# Altium PCB Pannel3.5x2 Ver1.0.PcbDoc (part 4 of 4)
Units mil, origin at the board's own origin, x right, y up, seen from the top; angles counter-clockwise.
Board outline 4133.86 x 2283.46 mil, 4 copper layers (SIGNAL, GROUND, PWR, SIGNAL (Bottom)), stack 61.627 mil thick; 222 components, 165 nets, 808 pads, 673 vias.
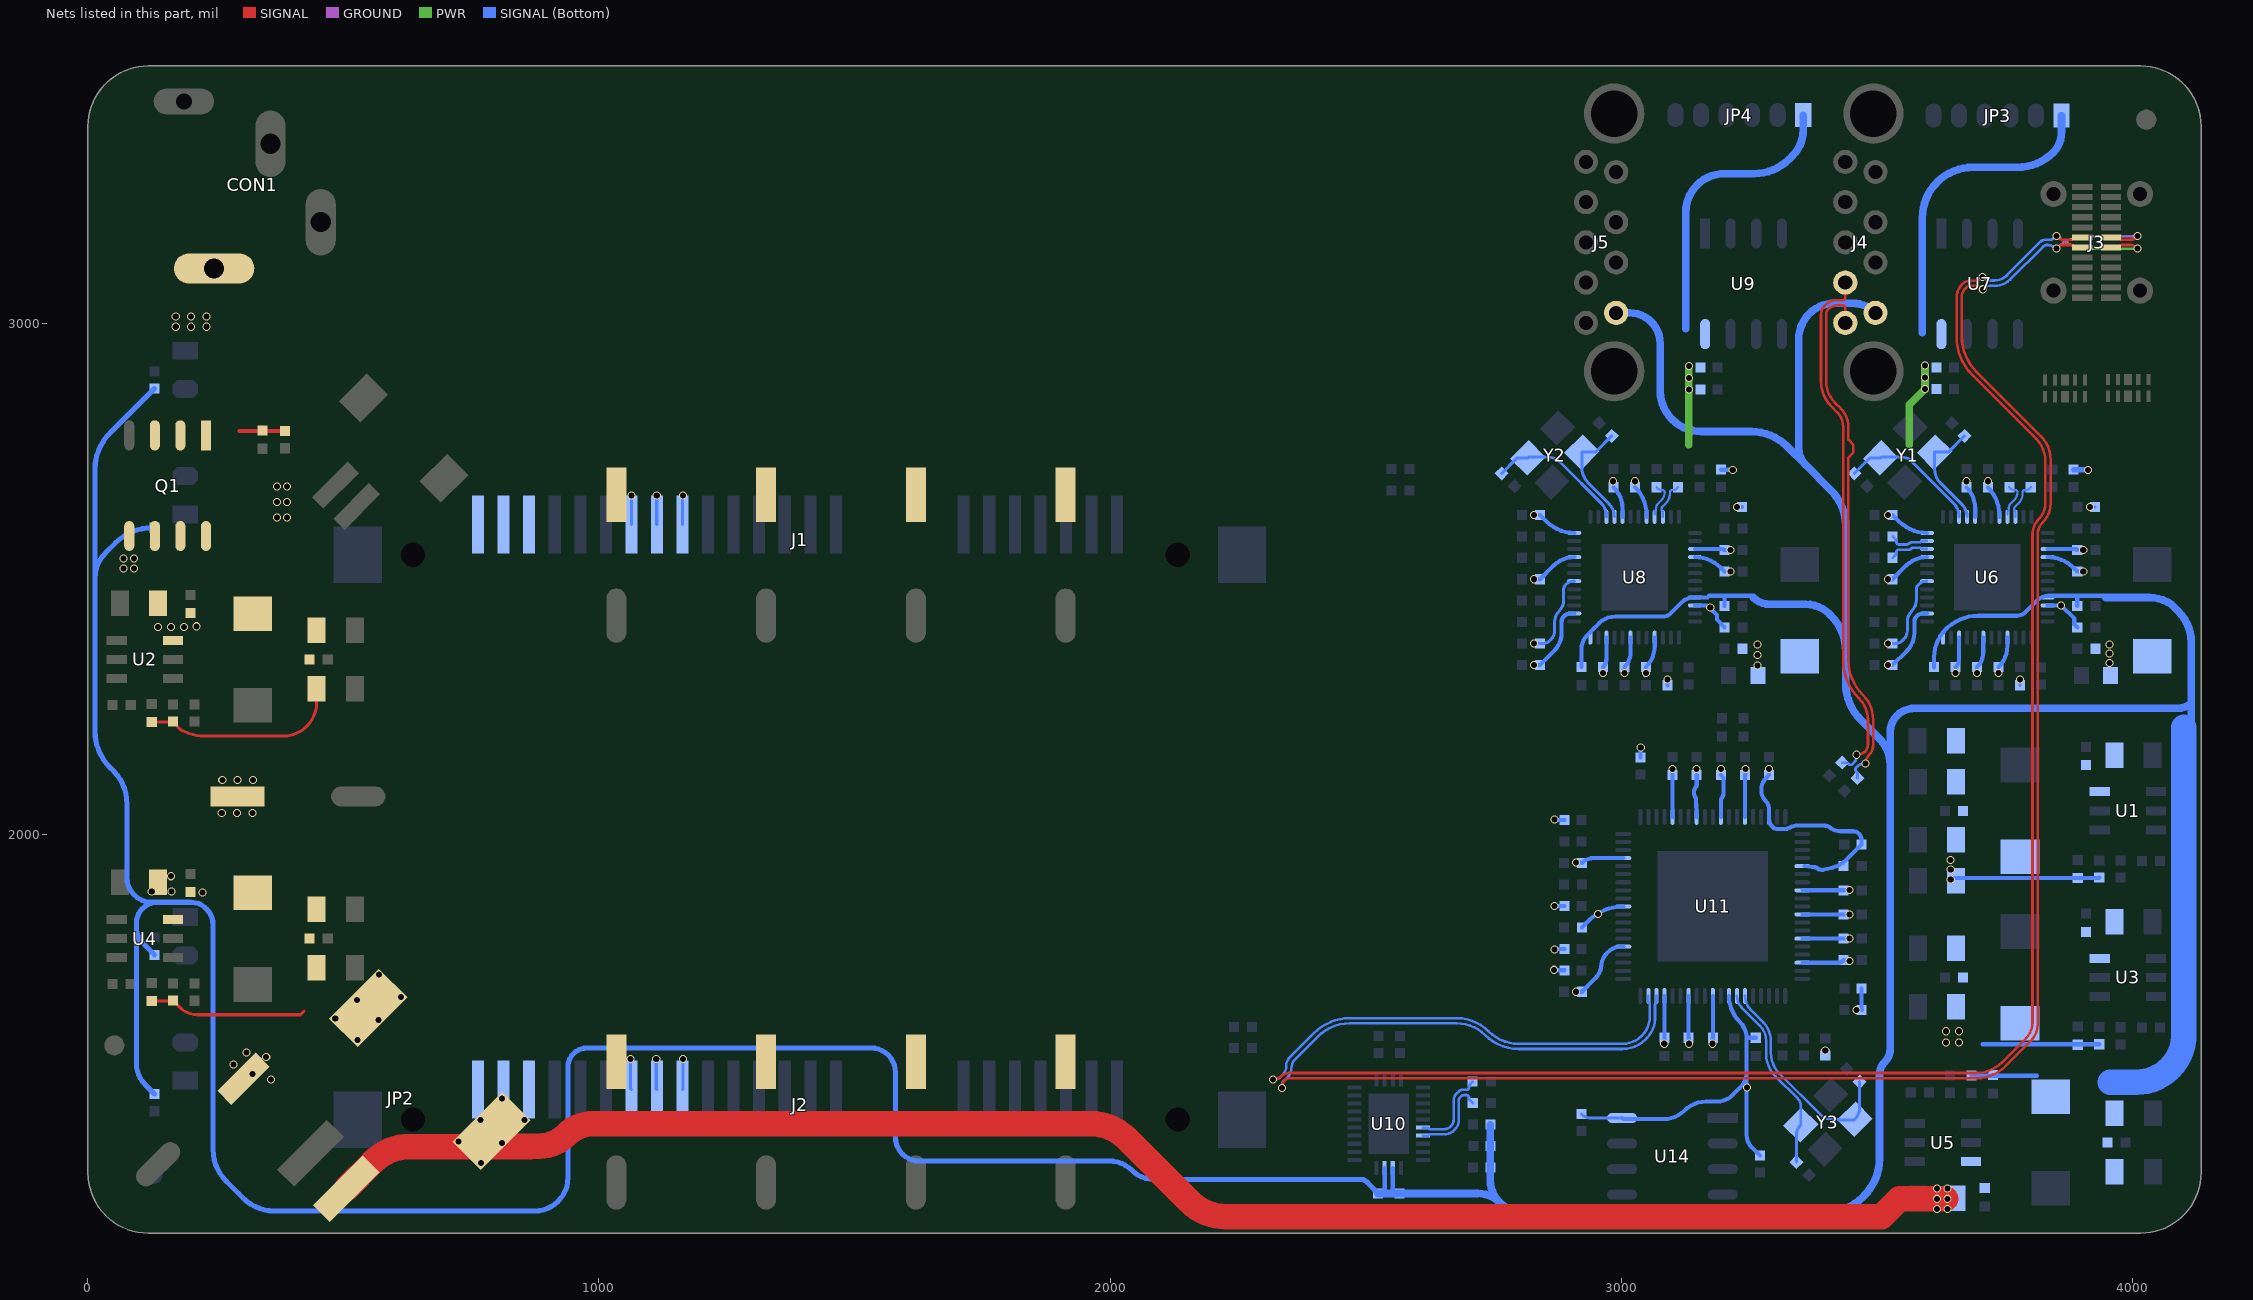
[diagram p6: the nets of this part, all layers, seen from the top]

## Via types
v1: diameter 15.75, hole 11.81, SIGNAL to SIGNAL (Bottom), tented both sides, 673 vias

## Nets (pads, with @x,y where several pads share a name; then routed paths per layer and width w, separated by ;. In a path a pad name is that pad's centre, name@x,y a point inside that pad or via, vN(x,y) a via of type N, cw(c..) or ccw(c..) an arc to the next point about the centre after c; other vN are vias at no path point) (continued)
SSTX3_N: C100.1 J4.9 | length 1032.8
  SIGNAL w5.1: 3418.07,2844.21 cw(c3460.16,2886.28) 3400.65,2886.28 3400.65,3017.54 cw(c3413.8,3017.54) 3404.5,3026.83 cw(c3423.85,3007.49) 3423.85,3034.85 3433.08,3034.85 cw(c3433.08,3029.75) 3436.68,3033.36 cw(c3433.08,3029.75) 3438.18,3029.75 J4.9@3438.18,3000.5 ; 3418.08,2844.2 3429.65,2832.64 cw(c3394.76,2797.75) 3444.1,2797.75 3444.1,2787 3444.1,2772 3454.1,2762 3454.1,2747 3444.1,2737 3444.1,2679.5 3444.1,2340.89 ccw(c3539.97,2340.89) 3472.18,2273.1 cw(c3422.63,2223.56) 3492.7,2223.56 3492.7,2174.76 cw(c3465.67,2174.76) 3484.83,2155.69 cw(c3465.67,2174.76) 3484.78,2155.64 ccw(c3500.08,2140.34) 3478.45,2140.34 cw(c3475.66,2140.34) v1(3477.63,2138.37)
  SIGNAL (Bottom) w5.1: 3459.97,2122.45 cw(c3454.95,2117.43) 3462.05,2117.43 C100.1@3462.05,2110.05 ; 3459.97,2122.45 3459.39,2123.03 cw(c3462.99,2126.64) 3457.89,2126.64 cw(c3462.99,2126.64) 3459.39,2130.25 3463.12,2133.97 cw(c3471.75,2125.34) v1@3471.75,2137.55
SSTX3_P: C98.1 J4.8 | length 1032.6
  SIGNAL w5.1: 3397.32,3033.93 ccw(c3413.7,3017.58) 3390.55,3017.65 ccw(c3413.7,3017.58) 3390.55,3017.58 3390.55,2886.21 ccw(c3459.99,2886.21) 3410.89,2837.11 3422.45,2825.55 cw(c3394.55,2797.66) 3434,2797.66 3434,2340.84 ccw(c3539.84,2340.84) 3464.97,2266.03 ; 3397.33,3033.95 3398.84,3035.46 cw(c3421.76,3012.54) 3421.76,3044.95 3433.08,3044.95 ccw(c3433.08,3050.05) 3436.68,3046.44 ccw(c3433.08,3050.05) 3438.18,3050.05 J4.8@3438.18,3079.3 ; v1(3460.37,2155.63) cw(c3462.34,2153.66) 3462.34,2156.45 3463.32,2156.45 ccw(c3463.32,2175.73) 3476.92,2162.06 ccw(c3463.32,2175.73) 3476.95,2162.1 ; 3465,2266 cw(c3422.5,2223.5) 3482.6,2223.5 3482.6,2175.73 cw(c3463.32,2175.73) 3476.99,2162.13
  SIGNAL (Bottom) w5.1: C98.1@3432.05,2140.05 3439.43,2140.05 cw(c3439.43,2132.95) 3444.45,2137.97 ; 3444.45,2137.97 3445.04,2137.38 ccw(c3448.64,2140.99) 3448.64,2135.89 ccw(c3448.64,2140.99) 3452.24,2137.38 3455.98,2141.12 ccw(c3447.34,2149.75) v1@3459.55,2149.75
SSTX4_N: C99.1 U6.22 | length 78.1
  SIGNAL (Bottom) w5.1: C99.1@3530.72,2541 3535.5,2545.78 ccw(c3529.42,2551.85) 3538.01,2551.85 cw(c3543.11,2551.85) 3539.51,2555.46 cw(c3543.11,2551.85) 3543.11,2556.95 3562.26,2556.95 ccw(c3562.26,2563.77) 3567.08,2558.95 cw(c3571.9,2554.13) 3571.9,2560.94 3582.48,2560.94 cw(c3582.48,2556.12) 3585.88,2559.53 ccw(c3589.29,2562.94) 3589.29,2558.12 U6.22@3597.89,2558.12
SSTX4_P: C101.1 U6.23 | length 78.1
  SIGNAL (Bottom) w5.1: C101.1@3530.72,2583 3535.5,2578.22 cw(c3529.42,2572.15) 3538.01,2572.15 ccw(c3543.11,2572.15) 3539.51,2568.54 ccw(c3543.11,2572.15) 3543.11,2567.05 3558.08,2567.05 ccw(c3558.08,2573.87) 3562.9,2569.05 cw(c3567.72,2564.23) 3567.72,2571.04 3582.48,2571.04 ccw(c3582.48,2575.86) 3585.88,2572.45 cw(c3589.29,2569.05) 3589.29,2573.87 U6.23@3597.89,2573.87
SSTX_N: C95.1 U10.21 | length 167.3
  SIGNAL (Bottom) w5.1: U10.21@2611.93,1410.37 2621.77,1410.37 2624.6,1413.19 2653.29,1413.19 ccw(c2653.29,1441.97) 2673.64,1421.62 2673.72,1421.7 ccw(c2653.44,1441.98) 2682.12,1441.98 2682.12,1479.98 cw(c2689.13,1479.98) 2684.17,1484.93 2686.67,1487.43 ; 2686.68,1487.44 cw(c2692.69,1481.4) 2692.69,1489.92 2697.02,1489.92 cw(c2697.02,1484.82) 2700.62,1488.43 cw(c2697.02,1484.82) 2702.12,1484.82 ccw(c2710.64,1484.82) 2704.6,1478.8 C95.1@2709.41,1474
SSTX_P: C94.1 U10.20 | length 167.1
  SIGNAL (Bottom) w5.1: U10.20@2611.93,1426.12 2621.77,1426.12 2624.6,1423.29 2653.26,1423.29 ccw(c2653.26,1442.06) 2666.52,1428.79 ccw(c2653.26,1442.06) 2672.02,1442.06 2672.02,1479.98 cw(c2689.13,1479.98) 2672.02,1480.04 cw(c2689.13,1479.98) 2676.99,1492.03 cw(c2689.13,1479.98) 2677.03,1492.07 ; 2677.03,1492.08 2682.04,1497.09 ; 2682.48,1497.53 cw(c2688.51,1491.51) 2688.51,1500.02 2697.02,1500.02 ccw(c2697.02,1505.12) 2700.62,1501.52 ccw(c2697.02,1505.12) 2702.12,1505.12 cw(c2711.07,1505.12) 2704.74,1511.46 C94.1@2709.28,1516
TX1_N: C39.2 U8.33 | length 70.1
  SIGNAL (Bottom) w4.29: U8.33@3065.37,2625.55 3065.37,2629.99 cw(c3070.03,2629.99) 3066.73,2633.29 ccw(c3063.44,2636.58) 3068.1,2636.58 3068.1,2638.86 cw(c3078.27,2638.86) 3071.07,2646.05 ; C39.2@3069,2679 C39.2@3071.87,2676.13 ; 3071.08,2646.05 3078.3,2653.27 ; C39.2@3071.88,2676.12 ccw(c3078.47,2682.73) 3078.47,2673.39 3080.56,2673.39 cw(c3080.56,2669.1) 3083.6,2672.14 cw(c3080.56,2669.1) 3084.86,2669.1 cw(c3062.47,2669.1) 3078.31,2653.29
TX1_P: C37.2 U8.34 | length 74.3
  SIGNAL (Bottom) w4.29: U8.34@3081.12,2621.29 3081.12,2629.99 ccw(c3076.46,2629.99) 3079.75,2633.29 cw(c3083.05,2636.58) 3078.39,2636.58 3078.39,2636.73 cw(c3083.41,2636.73) 3079.85,2640.28 3086.77,2647.19 ccw(c3066.54,2667.42) 3095.14,2667.42 3095.14,2669.1 cw(c3099.44,2669.1) 3096.4,2672.14 cw(c3099.44,2669.1) 3099.44,2673.39 3101.53,2673.39 ccw(c3101.53,2682.73) C37.2@3108.12,2676.12 ; C37.2@3108.13,2676.13 C37.2@3111,2679
TX2_N: C40.2 U6.33 | length 70.1
  SIGNAL (Bottom) w4.29: U6.33@3755.37,2625.55 3755.37,2629.99 cw(c3760.03,2629.99) 3756.73,2633.29 ccw(c3753.44,2636.58) 3758.1,2636.58 3758.1,2638.86 cw(c3768.27,2638.86) 3761.07,2646.05 ; C40.2@3759,2679 C40.2@3761.87,2676.13 ; 3761.08,2646.05 3768.3,2653.27 ; C40.2@3761.88,2676.12 ccw(c3768.47,2682.73) 3768.47,2673.39 3770.56,2673.39 cw(c3770.56,2669.1) 3773.6,2672.14 cw(c3770.56,2669.1) 3774.86,2669.1 cw(c3752.47,2669.1) 3768.31,2653.29
TX2_P: C38.2 U6.34 | length 74.3
  SIGNAL (Bottom) w4.29: U6.34@3771.12,2621.29 3771.12,2629.99 ccw(c3766.46,2629.99) 3769.75,2633.29 cw(c3773.05,2636.58) 3768.39,2636.58 3768.39,2636.73 cw(c3773.41,2636.73) 3769.85,2640.28 3776.77,2647.19 ccw(c3756.54,2667.42) 3785.14,2667.42 3785.14,2669.1 cw(c3789.44,2669.1) 3786.4,2672.14 cw(c3789.44,2669.1) 3789.44,2673.39 3791.53,2673.39 ccw(c3791.53,2682.73) C38.2@3798.12,2676.12 ; C38.2@3798.13,2676.13 C38.2@3801,2679
USBD_N: J3.A7 J3.B7 U11.56 | length 4405.8
  SIGNAL w5.1: v1(2318.21,1520.25) cw(c2320.18,1518.27) 2320.18,1521.07 2320.73,1521.07 ccw(c2320.73,1541.37) 2335.07,1526.99 ; 2335.09,1527.01 cw(c2349.44,1512.66) 2349.44,1532.96 3694,1532.96 ccw(c3694,1604.6) 3744.66,1553.94 3791.32,1600.6 ccw(c3759.66,1632.26) 3804.43,1632.26 3804.43,2586.55 cw(c3847.6,2586.55) 3804.43,2586.64 cw(c3847.6,2586.55) 3817.04,2617.04 ccw(c3786.55,2647.6) 3829.72,2647.6 3829.72,2729.44 ccw(c3766.44,2729.44) 3811.18,2774.18 3686.62,2898.75 cw(c3760.77,2972.91) 3655.9,2972.91 3655.9,3049.64 cw(c3693.42,3049.64) 3666.89,3076.17 3666.99,3076.27 ; 3667.02,3076.31 cw(c3683.95,3059.32) 3683.95,3083.3 3693.99,3083.3 ccw(c3693.99,3094.05) v1@3701.59,3086.45 ; v1@3856.98,3165.54 ccw(c3864.37,3175.27) 3864.37,3163.06 3879.69,3163.05 ccw(c3879.69,3171.24) 3885.48,3165.45 cw(c3891.27,3159.66) 3891.27,3167.85 J3.B7@3901.65,3167.85 ; J3.A7@3958.34,3148.16 3968.74,3148.16 ccw(c3968.74,3156.34) 3974.52,3150.55 cw(c3980.3,3144.77) 3980.3,3152.95 3996.63,3152.95 cw(c3996.63,3140.74) v1@4005.27,3149.37
  PWR w5.1: v1@3852,3172 ccw(c3915.26,3235.26) 3897.26,3147.63 ccw(c3915.26,3235.26) 3915.26,3145.8 v1(4010,3145.8) ; v1@4010,3146 v1@4012,3146
  SIGNAL (Bottom) w5.1: v1(2318.21,1520.25) cw(c2320.18,1518.27) 2320.18,1521.07 2324.08,1521.07 ccw(c2324.08,1533.28) 2332.72,1524.64 2337.36,1529.29 ccw(c2319.99,1546.67) 2344.56,1546.67 cw(c2369.13,1546.67) 2351.76,1564.04 2399.19,1611.47 cw(c2468.96,1541.7) 2399.27,1611.56 cw(c2468.96,1541.7) 2468.96,1640.37 2678.11,1640.37 cw(c2678.11,1552.2) 2740.44,1614.56 2740.5,1614.5 ccw(c2799.41,1673.41) 2799.41,1590.1 3002.08,1590.1 ccw(c3002.08,1643.87) 3040.1,1605.85 ccw(c3002.08,1643.87) 3055.85,1643.87 3055.85,1666.37 ccw(c3050.98,1666.37) U11.56@3054.42,1669.81 ; U11.56@3053,1683.8 3053,1673.25 ccw(c3057.87,1673.25) U11.56@3054.43,1669.81 ; v1@3711.73,3087.12 ccw(c3720.37,3095.76) 3720.37,3083.54 3729.87,3083.54 ccw(c3729.87,3118.69) 3749.62,3089.62 ccw(c3729.87,3118.69) 3754.72,3093.84 3820.3,3159.42 cw(c3829.08,3150.64) 3829.08,3163.05 3838.41,3163.05 ccw(c3838.41,3173.39) 3845.71,3166.08 v1@3849.03,3169.39 ; v1@3849.03,3169.39 cw(c3851,3167.42) v1(3851,3170.21)
  other v1: 3707,3090.7
USBD_P: J3.A6 J3.B6 U11.55 | length 4412.7
  SIGNAL w5.1: v1@2336.57,1508.1 cw(c2351.33,1508.1) 2340.89,1518.53 cw(c2351.33,1508.1) 2351.33,1522.86 3695.07,1522.86 ccw(c3695.07,1602.01) 3751.02,1546.02 ; v1(3707.13,3066.29) cw(c3707.13,3069.68) 3704.73,3067.28 ccw(c3690.45,3053) 3703.3,3068.58 ccw(c3690.45,3053) 3690.45,3073.2 3684,3073.2 ccw(c3684,3059.19) 3674.09,3069.09 ccw(c3693.63,3049.55) 3666,3049.55 3666,2975 ccw(c3765.83,2975) 3695.23,2904.42 3821.28,2778.37 cw(c3776.54,2733.62) 3839.82,2733.62 3839.82,2647.56 cw(c3786.64,2647.56) 3824.29,2610.01 cw(c3786.64,2647.56) 3824.24,2609.96 ccw(c3847.69,2586.51) 3814.53,2586.51 3814.53,1628.08 cw(c3769.76,1628.08) 3801.42,1596.42 3751.04,1546.04 ; v1@3856.98,3150.47 cw(c3864.37,3140.74) 3864.37,3152.95 3879.69,3152.95 cw(c3879.69,3144.77) 3885.48,3150.56 ccw(c3891.27,3156.35) 3891.27,3148.16 J3.B6@3901.65,3148.16 ; J3.A6@3958.34,3167.84 3968.74,3167.84 cw(c3968.74,3159.66) 3974.52,3165.45 ccw(c3980.3,3171.23) 3980.3,3163.05 3996.63,3163.05 ccw(c3996.63,3175.26) 4005.27,3166.63 v1@4008.03,3169.39 ; v1@4008.03,3169.39 cw(c4010,3167.41) v1(4010,3170.2)
  GROUND w5.1: v1@3850,3145 cw(c3910.85,3084.15) 3893.19,3168.37 cw(c3910.85,3084.15) 3910.85,3170.2 v1(4010,3170.2)
  SIGNAL (Bottom) w5.1: v1(2335.75,1503.28) ccw(c2333.77,1505.25) 2336.57,1505.25 2336.57,1509.15 cw(c2348.78,1509.15) 2340.14,1517.78 2347.46,1525.11 ccw(c2330.09,1542.48) 2354.66,1542.48 cw(c2379.23,1542.48) 2361.86,1559.86 2406.3,1604.3 cw(c2469,1541.61) 2469,1630.27 2678.04,1630.27 cw(c2678.04,1552.04) 2733.36,1607.36 ccw(c2799.41,1673.41) 2733.45,1607.26 ccw(c2799.41,1673.41) 2799.27,1580 ccw(c2799.41,1673.41) 2799.41,1580 3002.13,1580 ccw(c3002.13,1643.76) 3047.21,1598.68 3050.2,1601.67 ; 3050.23,1601.7 ccw(c3012.18,1639.69) 3065.95,1639.69 3065.95,1666.37 cw(c3070.82,1666.37) U11.55@3067.38,1669.81 ; U11.55@3067.37,1669.81 ccw(c3063.93,1673.25) 3068.8,1673.25 U11.55@3068.8,1683.8 ; v1@3711.88,3069.88 cw(c3720.5,3061.23) 3719.69,3073.42 cw(c3720.5,3061.23) 3720.5,3073.44 3732.03,3073.44 ccw(c3732.03,3113.48) 3734.99,3073.55 ccw(c3732.03,3113.48) 3760.34,3085.17 3824.49,3149.32 cw(c3833.26,3140.54) 3833.26,3152.95 3834.22,3152.95 cw(c3834.22,3132.52) 3848.67,3146.97 v1@3849.03,3146.62 ; v1@3849.03,3146.62 ccw(c3851,3148.59) v1(3851,3145.8)
VBUS: C5.2 C6.2 C19.2 C20.2 C29.1 C33.2 C34.1 C35.1 C57.2 C58.2 C79.2 C80.2 C89.2 C90.2 J4.1 J5.1 L5.2 R9.1 R12.1 R13.1 R14.1 R15.1 R28.1 R29.1 R34.2 U1.3 U3.3 U6.12 U6.45 U8.12 U8.45 U10.26 U10.27 | length 11989.3
  SIGNAL (Bottom) w8: U10.27@2537.12,1347.38 2537.12,1305.34 2545,1297.46 ; U10.26@2552.87,1347.38 2552.87,1300.09 2555.5,1297.46 ; C80.2@2922,2327 2922,2361.67 cw(c2962.24,2361.67) 2933.76,2390.1 ; 2933.78,2390.12 2945.57,2401.9 2945.98,2402.4 cw(c2955.13,2394.73) 2946.67,2403.15 ; 2946.69,2403.17 2947.15,2403.63 2956.36,2412.84 cw(c2988.13,2381.06) 2988.13,2426 3081.92,2426 ccw(c3081.92,2446.08) 3096.12,2431.88 3117.62,2453.38 cw(c3142.36,2428.64) 3140.26,2463.57 cw(c3142.36,2428.64) 3142.36,2463.63 U8.45@3144.11,2463.63 3168.63,2463.63 3171.78,2466.78 3202,2466.78 ; C79.2@3202,2447 3202,2466.78 ; 3257.98,2466.78 3202,2466.78 ; C58.2@3611.5,2326.5 ccw(c3568.32,2369.68) C58.2@3612,2327 3612,2346.29 cw(c3689.71,2346.29) 3634.76,2401.24 3636.69,2403.17 ; 3636.72,2403.2 cw(c3645.13,2394.73) 3637.3,2403.74 3639.37,2405.54 cw(c3698.46,2337.54) 3698.46,2427.63 3773.91,2427.63 ccw(c3773.91,2451.09) 3790.49,2434.49 3813.5,2457.5 cw(c3835.91,2435.09) 3822.13,2463.63 cw(c3835.91,2435.09) 3835.91,2466.78 3891,2466.78 ; R9.1@3685,1527.73 3813.27,1527.73 ; C57.2@3892,2447 3892,2465.78 3891,2466.78 ; 3947.98,2466.78 3891,2466.78
  SIGNAL (Bottom) w10: 95,1812.01 95,1552.51 ccw(c155.8,1552.51) 112.77,1509.55 ; 112.81,1509.52 R13.1@130.61,1491.71 ; R12.1@130.61,1764.25 108.55,1786.31 cw(c141.26,1819.02) 95,1819.02 95,1826.03 cw(c135.97,1826.03) 107,1855 cw(c135.97,1826.03) 135.97,1867 ; R15.1@130.61,2599.71 125.13,2599.71 ccw(c125.13,2499.71) 54.42,2570.42 34.21,2550.21 ccw(c83.01,2501.42) 14,2501.42 ; R14.1@130.61,2872.25 43.29,2784.92 ccw(c114,2714.21) 14,2714.21 14,2501.42 ; 231.97,1854.03 ccw(c200.62,1822.62) 226.64,1858.57 220.9,1862.73 ccw(c215.62,1855.44) 217.68,1864.2 210.78,1865.82 ccw(c200.62,1822.62) 200.62,1867 135.97,1867 ; 232,1854 cw(c200.62,1822.62) 245,1822.62 245,1706.07 245,1383.56 ccw(c333,1383.56) 270.82,1321.3 295.18,1296.93 303.3,1288.82 ccw(c365.56,1351) 365.56,1263 873.94,1263 ccw(c873.94,1328.34) 920.12,1282.12 ; 920.16,1282.16 ccw(c873.94,1328.34) 939.27,1328.34 939.27,1544.91 cw(c976.36,1544.91) 950.14,1571.14 cw(c976.36,1544.91) 976.36,1582 1532.2,1582 cw(c1532.2,1534.2) 1566,1568 cw(c1532.2,1534.2) 1580,1534.2 1580,1407.2 ccw(c1626.36,1407.2) 1593.58,1374.42 ccw(c1626.36,1407.2) 1626.36,1360.84 1998.81,1360.84 cw(c1998.81,1299.65) 2042.06,1342.94 ; 2042.08,1342.92 ccw(c2085.35,1386.19) 2085.35,1325 2489.79,1325 cw(c2489.79,1306.92) 2502.57,1319.71 cw(c2490,1307) 2502.61,1319.66 cw(c2490,1307) 2502.66,1319.61 cw(c2490,1307) 2502.94,1319.33 2507.87,1314.15 2519.16,1302.31 C90.2@2524,1297.46 ; 14,2501.42 14,2201.42 ccw(c114,2201.42) 43.29,2130.71 cw(c-16.98,2059.23) 76.51,2059.23 76.51,1915.33 ccw(c124.43,1915.33) 90.55,1881.45 ccw(c125.44,1916.34) 125.44,1867 135.97,1867
  SIGNAL (Bottom) w15: C90.2@2524,1297.46 2545,1297.46 2555.5,1297.46 C89.2@2566,1297.46 2719.15,1297.46 cw(c2719.15,1236.18) 2762.43,1279.57 ccw(c2807.79,1324.87) 2807.79,1260.76 3401.42,1260.76 ccw(c3401.42,1360.76) 3472.13,1290.05 3475.71,1293.63 ccw(c3405,1364.34) 3505,1364.34 3505,1529.3 cw(c3541.12,1529.3) 3515.55,1554.82 ; R29.1@2743.73,1432 R34.2@2743.73,1348 2743.73,1323.13 ccw(c2803.76,1323.13) 2761.32,1280.68 ; J5.1@2989.9,3020.2 3015.91,3020.2 cw(c3015.91,2960.11) 3058.4,3002.6 cw(c3015.91,2960.11) 3076,2960.11 3076,2868.23 ccw(c3156.23,2868.23) 3099.48,2811.52 ccw(c3156.23,2868.23) 3156.23,2788 3253.72,2788 cw(c3253.72,2688) 3324.37,2758.77 cw(c3253.72,2688) 3324.43,2758.71 3360.51,2722.63 ; 3258.01,2463.26 ccw(c3290.05,2495.35) 3290.05,2450 3361,2450 cw(c3361,2384.82) 3407.09,2430.91 3409.86,2428.14 cw(c3339.15,2357.43) 3439.15,2357.43 ; J4.1@3497.18,3020.2 ccw(c3451.79,2974.81) 3473.42,3035.25 ccw(c3451.79,2974.81) 3451.79,3039 3417.52,3039 ccw(c3417.52,2968.48) 3367.67,3018.36 ccw(c3417.52,2968.48) 3347,2968.48 3347,2755.34 ccw(c3393.34,2755.34) 3360.51,2722.63 ; 3515.61,1554.87 ccw(c3490.04,1580.39) 3526.16,1580.39 3526.16,2135.16 ; 3539.15,2232.15 ccw(c3570.51,2200.79) 3526.16,2200.79 3526.16,2135.17 ; 3539.18,2232.18 cw(c3574.11,2197.19) 3574.11,2246.63 4089.97,2246.63 ccw(c4089.97,2282.03) 4115,2257 ; 3947.98,2463.28 4032.38,2463.28 cw(c4032.38,2385.2) 4076.13,2449.87 4089.54,2436.46 cw(c4028.06,2374.99) 4115,2374.99 4115,2257 ; 4100.65,2209 4115,2223.35 4115,2257 ; 3360.51,2722.63 3409.86,2673.29 cw(c3339.15,2602.58) 3439.15,2602.58 3439.15,2357.43 ; 3439.15,2357.43 3439.15,2294.6 ccw(c3539.15,2294.6) 3468.44,2223.89 3504.13,2188.19 cw(c3450.93,2135) 3526.16,2135.17
  SIGNAL (Bottom) w50: 3956.56,1515 4007.35,1515 ccw(c4007.35,1608.3) 4073.33,1542.33 ccw(c4007.35,1608.3) 4100.65,1608.3 4100.65,2209
VCC1.05V-VL822: C1.1 C9.2 C11.1 C12.1 C109.2 C110.2 C111.2 C112.2 C113.2 C114.2 C115.2 C116.2 C117.2 C118.2 C119.2 C120.2 C121.1 C122.1 L1.2 R1.1 U11.5 U11.8 U11.11 U11.14 U11.27 U11.30 U11.33 U11.36 U11.48 U11.51 U11.54 U11.67 | length 1402.7
  SIGNAL (Bottom) w8: 2933.36,1828.36 C119.2@2923,1818 2935.86,1830.86 cw(c3003.8,1762.91) U11.67@3003.8,1859 ; v1(3084,1590.28) 3084.25,1590.53 3084.25,1601.75 C112.2@3084.5,1602 U11.54@3084.5,1683.8 ; U11.5@3100.3,2034.2 C116.2@3100.3,2116 v1(3100.3,2127.72) ; U11.51@3131.8,1683.8 C117.2@3131.8,1602 3131.9,1601.9 3131.9,1590.38 v1(3132,1590.28) ; U11.8@3147.5,2034.2 3145.86,2069.17 ccw(c3137.86,2068.8) 3144.61,2073.1 cw(c3158.95,2082) 3145.76,2092.53 ccw(c3139.5,2097.51) 3147.5,2097.51 C109.2@3147.5,2116 ; v1(3178.75,1590.28) 3178.88,1590.41 3178.88,1601.88 C110.2@3179,1602 U11.48@3179,1683.8 ; U11.11@3194.7,2034.2 3194.7,2062.79 cw(c3216.21,2062.79) 3196.04,2070.26 cw(c3203.53,2067.45) 3197.02,2072.1 ccw(c3183.35,2082) 3200.23,2082.16 3200.08,2110.16 C120.2@3194.7,2116 ; U11.14@3242,2034.2 C111.2@3242,2116 ccw(c3239.59,2118.41) 3243,2118.41 v1(3243,2127.72) ; U11.36@3354.2,1748.8 3422.45,1748.8 ccw(c3422.45,1766.55) C115.2@3435,1754 3436.04,1752.96 3445.68,1752.96 v1(3446.72,1751.93) ; U11.33@3354.2,1796 C118.2@3435,1796 v1(3446.72,1796) ; U11.30@3354.2,1843.3 C113.2@3435,1843.3 3435.15,1843.15 3446.57,1843.15 v1(3446.72,1843) ; U11.27@3354.2,1890.5 C114.2@3435,1890.5 3435.25,1890.75 3446.47,1890.75 v1(3446.72,1891) ; C121.1@3650.72,1914.28 C9.2@3893,1914.28 3893.49,1914.78 3934.51,1914.78 R1.1@3935,1915.27
  other v1: 2954,1844 3644.5,1911.99 3644.5,1930.99 3644,1950 3147.5,2127.72 3194.7,2127.72
VCC1V2-B: C46.2 C47.2 C49.2 C50.2 C51.2 C52.2 C53.2 C54.2 C55.2 C56.2 L6.2 U6.4 U6.10 U6.18 U6.21 U6.24 U6.29 U6.32 U6.40 | length 723.6
  SIGNAL (Bottom) w6: v1(3522.05,2373) 3536.35,2373 ccw(c3536.35,2391.47) 3544.79,2375.04 ccw(c3536.35,2391.47) 3549.4,2378.4 3552.78,2381.78 ccw(c3536.52,2398.03) 3559.51,2398.03 3559.51,2416 cw(c3588.64,2416) 3568.02,2436.58 ; v1(3522.05,2499) C56.2@3530.72,2499 ; v1(3522.05,2625) C54.2@3530.72,2625 ; 3568.04,2436.6 3568.31,2436.87 ; 3568.33,2436.89 ccw(c3547.06,2458.12) 3577.11,2458.12 3577.11,2479.38 cw(c3588.05,2479.38) 3579.91,2486.68 3582.59,2489.67 cw(c3595.78,2476.46) 3595.78,2495.13 U6.18@3597.89,2495.13 ; v1(3653.58,2315.28) 3653.58,2326.58 C52.2@3654,2327 ; C55.2@3675,2679 v1(3675,2690.72) ; C49.2@3717,2679 v1(3717,2690.72) ; C51.2@3738,2327 v1(3738,2315.28) 3738,2313.41 ccw(c3741.41,2313.41) v1@3739,2311
  SIGNAL (Bottom) w8: C56.2@3530.72,2499 3557.25,2525.54 cw(c3597.89,2484.9) U6.21@3597.89,2542.37 ; C54.2@3530.72,2625 3543.62,2612.09 ccw(c3597.89,2666.36) U6.24@3597.89,2589.61 ; C52.2@3654,2327 ccw(c3637.39,2343.61) 3660.88,2343.61 U6.10@3660.88,2384.89 ; C55.2@3675,2679 cw(c3633.05,2637.05) 3692.38,2637.05 U6.29@3692.38,2621.11 ; C49.2@3717,2679 cw(c3662.39,2624.39) 3739.62,2624.39 U6.32@3739.62,2621.11 ; C51.2@3738,2327 ccw(c3696.07,2368.93) 3755.37,2368.93 U6.4@3755.37,2384.89 ; U6.40@3834.11,2542.37 cw(c3834.11,2471.1) 3861.24,2537.01 cw(c3834.11,2471.1) 3884.51,2521.49 C50.2@3892,2514 v1(3903.72,2514)
  other v1: 3955,2335 3955,2354 3955,2371
VCC1V2-C: C68.2 C69.2 C71.2 C72.2 C73.2 C74.2 C75.2 C76.2 C77.2 C78.2 L7.2 U8.4 U8.10 U8.18 U8.21 U8.24 U8.29 U8.32 U8.40 | length 739.8
  SIGNAL (Bottom) w6: v1@2826,2499 v1(2829,2499) C73.2@2840.72,2499 ; v1(2829,2373) C74.2@2840.72,2373 2846.35,2373 ccw(c2846.35,2391.47) 2859.4,2378.4 2862.78,2381.78 ccw(c2846.52,2398.03) 2869.51,2398.03 2869.51,2415.62 cw(c2899.56,2415.62) 2878.31,2436.87 ; v1(2829,2625) C71.2@2840.72,2625 ; 2878.33,2436.89 ccw(c2857.06,2458.12) 2887.11,2458.12 2887.11,2479.38 cw(c2898.05,2479.38) 2888.72,2485.1 2889.84,2486.92 2892.58,2489.66 cw(c2905.78,2476.46) 2905.78,2495.13 U8.18@2907.89,2495.13 ; v1(2964,2315.28) C77.2@2964,2327 ; v1(2984,2690.72) 2985,2689.72 C78.2@2985,2679 ; C76.2@3027,2679 v1(3027,2690.72) ; v1@3045,2309.65 3048,2312.65 v1(3048,2315.28) C75.2@3048,2327 ; C72.2@3202,2514 v1(3213.72,2514) v1@3214.72,2513
  SIGNAL (Bottom) w8: C73.2@2840.72,2499 2867.25,2525.54 cw(c2907.89,2484.9) U8.21@2907.89,2542.37 ; C71.2@2840.72,2625 2853.62,2612.09 ccw(c2907.89,2666.36) U8.24@2907.89,2589.61 ; C77.2@2964,2327 ccw(c2947.39,2343.61) 2970.88,2343.61 U8.10@2970.88,2384.89 ; C78.2@2985,2679 cw(c2943.05,2637.05) 3002.38,2637.05 U8.29@3002.38,2621.11 ; C76.2@3027,2679 cw(c2972.39,2624.39) 3049.62,2624.39 U8.32@3049.62,2621.11 ; C75.2@3048,2327 ccw(c3006.07,2368.93) 3065.37,2368.93 U8.4@3065.37,2384.89 ; U8.40@3144.11,2542.37 cw(c3144.11,2471.1) 3194.51,2521.49 C72.2@3202,2514
  other v1: 3266,2330 3266,2351 3266,2371
VCC3.3V-VL822: C15.1 C23.2 C25.1 C26.1 C102.2 C103.2 C104.2 C105.2 C106.2 L3.2 R5.1 R30.2 R31.2 R33.2 R35.2 R38.2 R40.2 R43.2 R44.2 R45.2 R46.2 R47.1 U11.17 U11.24 U11.46 U11.62 U11.73 U14.8 | length 1784.5
  SIGNAL (Bottom) w6: R47.1@2922,1452.73 ccw(c2940.67,1471.4) 2940.67,1445 U14.8@3001.57,1445
  SIGNAL (Bottom) w8: v1(2868,1735) ccw(c2870.41,1737.41) 2870.41,1734 R33.2@2888.54,1734 ; v1(2869,1775) cw(c2871.41,1772.59) 2871.41,1776 R31.2@2888.54,1776 ; v1(2869,1860) R30.2@2888.54,1860 ; v1(2869,2029) ccw(c2871.41,2031.41) 2871.41,2028 R35.2@2888.54,2028 ; v1(2911.28,1692) C103.2@2923,1692 2947.86,1716.86 ; v1(2911.28,1945) 2911.78,1944.5 2922.5,1944.5 C102.2@2923,1944 cw(c2945.93,1921.07) 2945.93,1953.5 U11.73@3003.8,1953.5 ; 2948.98,1717.98 ccw(c2919.96,1747) 2958.71,1733.48 ccw(c2919.96,1747) 2960.41,1740.04 ccw(c2919.96,1747) 2960.98,1745.75 cw(c3003.3,1738.6) 2972.95,1768.95 cw(c3000.35,1741.56) 3000.35,1780.3 U11.62@3003.8,1780.3 ; U14.8@3001.57,1445 3003.81,1442.76 3082.56,1442.76 ccw(c3082.56,1501.21) 3123.88,1459.88 cw(c3165.21,1418.56) 3165.21,1477 3185.87,1477 ccw(c3185.87,1523.56) 3218.79,1490.64 3232.43,1504.27 ccw(c3201.7,1535) 3245.16,1535 ; R38.2@3037.3,2150.57 3037.65,2150.92 3037.65,2169.65 v1(3038,2170) ; U11.46@3210.5,1683.8 ccw(c3281.24,1683.8) 3231.21,1633.79 ; 3231.24,1633.76 cw(c3197.55,1600.12) 3245.16,1600.12 ; C106.2@3263,1602 3245.16,1602 3245.16,1600.12 ; R46.2@3271,1371.73 3255.36,1387.37 cw(c3279.98,1412) 3245.16,1412 3245.16,1535 ; v1(3289,2127.72) 3289.1,2127.62 3289.1,2116.1 C104.2@3289.2,2116 3283.47,2110.27 ccw(c3306.35,2087.4) 3274,2087.4 3274,2084.75 ccw(c3299.95,2084.75) 3281.58,2066.42 cw(c3263.25,2048.05) 3289.2,2048.05 U11.17@3289.2,2034.2 3289.2,2030.05 ccw(c3309.66,2030.05) 3292.01,2019.71 ccw(c3309.66,2030.05) 3295.19,2015.58 ccw(c3305,2022.39) 3296.54,2013.97 ccw(c3305,2022.39) 3296.58,2013.92 ccw(c3305,2022.39) 3305,2010.45 3310.38,2010.45 3320.7,2010.45 ccw(c3320.7,2022.39) 3325.29,2011.37 3331.68,2014.03 ; 3334,2015 3331.68,2014.03 ; U11.24@3358,1938 3378.78,1935.5 cw(c3377.87,1927.56) 3382.71,1933.92 ccw(c3393,1947.3) 3396.95,1930.89 3411.29,1934.34 ccw(c3399,1989.91) 3439.24,1949.67 R45.2@3469.57,1980 3469.57,1989.96 ccw(c3453.96,1989.96) 3465,2001 ccw(c3452.93,1988.93) 3452.93,2006 3428.39,2006 cw(c3428.39,2038.08) 3406.52,2014.61 ccw(c3396.1,1993.1) 3396.1,2017 3342.81,2017 ccw(c3342.81,1994.64) 3341.78,2016.98 ccw(c3342.81,1994.64) 3331.68,2014.03 ; v1(3459.98,1656) R44.2@3469.73,1656 ; R43.2@3469.73,1698 3469.73,1657.27 R44.2@3471,1656 ; 3706.73,1589.27 R5.1@3935,1589.27 ; 3245.16,1535 3245.16,1600.12
  other v1: 3246,1505 3399,1577.17 3635,1592.82 3661,1592.82 3635,1614.69 3661,1614.69
VCC3V3-B: C48.2 C59.2 C60.2 C61.2 C62.2 JP3.1 R16.1 R17.1 R20.1 R21.1 U6.7 U6.14 U6.39 U6.46 U7.8 | length 1210.7
  PWR w15: 3563,2762 3563,2840 v1(3594,2871) v1(3594,2894) v1(3594,2917)
  SIGNAL (Bottom) w6: v1(3522.05,2331) C62.2@3530.72,2331 ; v1(3695.84,2315.28) v1@3697.7,2313.42 ; C48.2@3780,2291.57 v1(3780,2303.29) ; C60.2@3892,2556 v1(3903.72,2556) ; v1@3915.58,2641 v1(3916.58,2640) R16.1@3926.32,2640
  SIGNAL (Bottom) w8: C62.2@3530.72,2331 3558.49,2358.78 ccw(c3522.88,2394.39) 3573.24,2394.39 3573.24,2415.25 cw(c3590.13,2415.25) 3578.19,2427.19 cw(c3590.13,2415.25) 3590.13,2432.13 U6.14@3597.89,2432.13 ; v1(3695.84,2315.28) 3695.92,2315.37 3695.92,2326.92 C61.2@3696,2327 ccw(c3666.73,2356.27) 3708.13,2356.27 U6.7@3708.13,2384.89 ; U6.46@3834.11,2447.88 v1(3860.12,2447.88) 3886.16,2421.84 3886.16,2410.84 C59.2@3892,2405 ; U6.39@3834.11,2558.12 3886.89,2558.12 cw(c3886.89,2550.89) C60.2@3892,2556
  SIGNAL (Bottom) w10: R17.1@3885,2713.32 3885.11,2713.21 3912.73,2713.21 v1(3912.84,2713.1)
  SIGNAL (Bottom) w15: 3589,2981 3589,3206.1 cw(c3687.75,3206.1) 3617.92,3275.92 cw(c3687.75,3206.1) 3687.75,3304.85 3774.43,3304.85 ccw(c3774.43,3404.85) 3845.14,3334.14 ccw(c3806.84,3372.43) 3861,3372.43 JP3.1@3861,3406
VCC3V3-C: C70.2 C81.2 C82.2 C83.2 C84.2 JP4.1 R22.1 R23.1 R26.1 R27.2 U8.7 U8.14 U8.39 U8.46 U9.8 | length 1147.7
  PWR w15: 3132,2762 v1(3132,2870) v1(3132,2893) v1(3132,2916)
  SIGNAL (Bottom) w8: v1@2828,2330 v1(2829,2331) C82.2@2840.72,2331 2868.49,2358.78 ccw(c2832.88,2394.39) 2883.24,2394.39 2883.24,2415.25 cw(c2900.13,2415.25) 2888.19,2427.19 cw(c2900.13,2415.25) 2900.13,2432.13 U8.14@2907.89,2432.13 ; v1(3006,2315.28) C81.2@3006,2327 ccw(c2976.73,2356.27) 3018.13,2356.27 U8.7@3018.13,2384.89 ; C70.2@3090,2291.57 3090.21,2291.78 3090.21,2303.07 v1(3090.42,2303.29) ; U8.46@3144.11,2447.88 3144.17,2447.82 3168.08,2447.82 3171.9,2444 v1(3174,2444) 3174,2441.9 3186.8,2429.11 3186.8,2420.21 C84.2@3202,2405 ; U8.39@3144.11,2558.12 3196.89,2558.12 cw(c3196.89,2550.89) C83.2@3202,2556 v1(3213.72,2556) v1@3214.72,2557 ; R23.1@3195,2713.32 3195.16,2713.16 3217.84,2713.16 v1(3218,2713) ; v1(3226.58,2640) R22.1@3236.32,2640
  SIGNAL (Bottom) w15: 3126,2989 3126,3216.5 cw(c3202.05,3216.5) 3148.28,3270.28 cw(c3202.05,3216.5) 3202.05,3292.55 3259.96,3292.55 ccw(c3259.96,3389.04) 3328.19,3320.81 3335.36,3327.99 ccw(c3285.54,3377.81) 3356,3377.81 JP4.1@3356,3407
VCC5V-A: C2.1 C10.2 C13.1 C14.1 E5.1 E6.1 E7.1 E8.1 J1.P7 J1.P8 J1.P9 L2.2 R2.1 | length 567.2
  SIGNAL w6: C10.2@125,2219.55 R2.1@166,2219.55 ; R2.1@166,2220 166.24,2219.77 172.36,2213.69 178.3,2207.81 cw(c174.09,2203.53) 178.63,2207.45 ccw(c193.77,2220.41) 186.75,2201.76 197.33,2197.75 ccw(c228.77,2280.77) 228.77,2192 381.65,2192 ccw(c381.65,2258.02) 428.34,2211.34 428.46,2211.46 ccw(c382.09,2257.84) 447.67,2257.84 C14.1@447.67,2285
  SIGNAL (Bottom) w6: J1.P9@1063.43,2606.09 1063.43,2662.43 v1(1064,2663) ; v1(1113,2663) 1113,2606.52 J1.P8@1113.43,2606.09 ; J1.P7@1163.43,2606.09 1163.43,2662.43 v1(1164,2663)
VCC5V-B: C16.1 C24.2 C27.1 C28.1 E1.1 E2.1 E3.1 E4.1 J2.P7 J2.P8 J2.P9 JP2.0@548.61,1660.31 L4.2 R6.1 | length 489.6
  SIGNAL w6: C24.2@125,1673.55 166.02,1673.55 R6.1@167,1674.54 180.77,1660.77 ccw(c214.01,1694.01) 214.01,1647 416,1647 423,1654
  SIGNAL (Bottom) w6: v1(1062,1560) 1062,1502.27 J2.P9@1063.43,1500.84 ; v1(1112,1560) 1112,1502.27 J2.P8@1113.43,1500.84 ; J2.P7@1163.43,1500.84 1164,1501.41 v1(1164,1560)
  other v1: 528,1598 569,1637 484,1640 527,1676 613,1682 570,1726
VCC12V: C7.2 C8.2 C21.2 C22.2 C31.2 C32.2 E9.1 E10.1 J1.P13 J1.P14 J1.P15 J2.P13 J2.P14 J2.P15 JP2.0@789.52,1419.39 JP2.1 Q1.5 Q1.6 Q1.7 Q1.8 U2.3 U4.3 U5.3 | length 3405.1
  SIGNAL w50: JP2.1@505.34,1306.54 558.68,1359.87 cw(c629.39,1289.16) 558.78,1359.98 cw(c629.39,1289.16) 629.39,1389.16 JP2.0@738.97,1389.16 ; v1@3634.96,1287 v1(3618,1287) 3544,1287 3509,1252 2226.42,1252 cw(c2226.42,1352) 2155.71,1281.29 2032.29,1404.71 ccw(c1961.58,1334) 1961.58,1434 989.11,1434 ccw(c989.11,1358.89) 936,1412 cw(c882.89,1465.11) 882.89,1390 866.46,1390 ; JP2.0@738.97,1389.16 865.62,1389.16 866.46,1390 ; JP2.0@738.97,1389.16 769.2,1419.39 JP2.0@789.52,1419.39 818.92,1390 866.46,1390
  other v1: 3618,1267 3638,1267 3638,1287 3618,1307 3638,1307 768.92,1357.08 809.92,1396.08 724.92,1399.08 767.92,1441.08 853.92,1441.08 809.92,1483.08 358,1520 322,1531 285,1550 349,1564 310,1573 224,1886 125,1888 164,1888 163,1918 262,2042 292,2042 322,2042 263,2106 293,2106 323,2106 137,2406 163,2406 188,2406 213,2407 70,2520 90,2520 70,2540 90,2540 370,2620 390,2620 370,2650 390,2650 370,2680 390,2680
VIN: C36.1 CON1.1 Q1.1 Q1.2 Q1.3 R11.1 | length 88.4
  SIGNAL w8: 297,2789 297.27,2788.73 R11.1@385.33,2788.73
  other v1: 172,2993 202,2993 232,2993 172,3013 202,3013 232,3013
XIN: C108.1 U11.45 Y3.3 | length 372.7
  SIGNAL (Bottom) w5.1: U11.45@3226.2,1683.8 ccw(c3258.06,1683.8) 3235.53,1661.27 3271.4,1625.4 cw(c3242.56,1596.56) 3283.35,1596.56 3283.35,1570.67 ccw(c3345.85,1570.67) 3301.63,1526.5 3345.43,1482.7 cw(c3331.73,1469) 3351.11,1469 Y3.3@3351.11,1431.43
  SIGNAL (Bottom) w6: C108.1@3342.47,1358.53 3342.47,1410.59 cw(c3371.95,1410.59) Y3.3@3351.11,1431.43
XIN-B: C66.1 U6.27 Y1.3 | length 272.7
  SIGNAL (Bottom) w6: C66.1@3456,2706 3486.43,2736.43 Y1.3@3507.11,2736.43 cw(c3510.47,2733.07) 3510.47,2737.82 3549.32,2737.82 cw(c3549.32,2712.32) 3567.35,2730.35 3638.2,2659.51 3649.77,2647.94 cw(c3622.94,2621.11) 3660.67,2625.11 cw(c3622.94,2621.11) U6.27@3660.88,2621.11
XIN-C: C88.1 U8.27 Y2.3 | length 273.3
  SIGNAL (Bottom) w6: C88.1@2766,2706 2796.43,2736.43 Y2.3@2817.11,2736.43 2818.5,2737.82 2857,2737.82 cw(c2857,2704.99) 2880.2,2728.22 2961.58,2646.85 cw(c2939.12,2624.39) 2970.88,2624.39 U8.27@2970.88,2621.11
XOUT: C107.1 U11.44 Y3.1 | length 433.8
  SIGNAL (Bottom) w5.1: U11.44@3242,1683.8 ccw(c3280.93,1683.8) 3242.53,1677.39 ccw(c3280.93,1683.8) 3253.39,1656.28 ; 3253.4,1656.27 3272.93,1636.75 3277.8,1631.87 cw(c3242.56,1596.56) 3277.88,1631.8 cw(c3242.56,1596.56) 3292.45,1596.56 3292.45,1572.56 ccw(c3350.4,1572.56) 3309.42,1531.58 3389.28,1451.72 ccw(c3411.37,1473.8) 3411.37,1442.57 3424.31,1442.57 3425.7,1441.18 3455.5,1441.18 Y3.1@3456.89,1442.57
  SIGNAL (Bottom) w6: Y3.1@3456.89,1442.57 ccw(c3434.78,1464.68) 3466.05,1464.68 C107.1@3466.05,1515.94
XOUT-B: C65.1 U6.28 Y1.1 | length 221.1
  SIGNAL (Bottom) w6: 3623.92,2687.92 3666.29,2645.55 cw(c3642.21,2621.47) U6.28@3676.27,2621.47 ; 3623.9,2687.95 cw(c3650.56,2714.56) 3612.89,2714.56 Y1.1@3612.89,2747.57 3639.62,2747.57 C65.1@3671.53,2779.47
XOUT-C: C87.1 U8.28 Y2.1 | length 220.8
  SIGNAL (Bottom) w6: C87.1@2981.53,2779.47 2949.62,2747.57 Y2.1@2922.89,2747.57 2922.89,2717.9 ccw(c2966.9,2717.9) 2935.78,2686.78 2975.79,2646.78 cw(c2950.48,2621.47) U8.28@2986.27,2621.47
pads on no net: J1. J1.P1 J1.P2 J1.P3 J1.SH1 J1.SH2 J2. J2.P1 J2.P2 J2.P3 J2.SH2 J3.A8 J3.B8 MR1.Mark MR2.Mark MR3.Mark MR4.Mark U1.5 U2.5 U3.5 U4.5 U5.5 U6.16 U6.17 U6.25 U6.35 U6.41 U6.48 U8.16 U8.17 U8.25 U8.35 U8.41 U8.48 U10.11 U10.12 U10.14 U10.15 U10.16 U10.22 U11.2 U11.21 U11.39 U11.42 U11.57 U11.58 U11.59 U11.60 U11.61 U11.63 U11.64 U11.76

## Polygon pours and split planes (outlines as drawn)
VCC1.05V-VL822 on PWR "VCC1.05V-VL822_L03_P005" (solid, remove dead copper, pour order 5): 3666,1953 3666,1705 3631,1670 3434,1670 3346,1582 3021,1582 2934,1669 2934,2052 3025,2143 3241,2143 3267,2117 3267,2030 3242,2005 3047,2005 3009,1967 3009,1899 3032,1876 3207,1876 3242.37,1911.37 3323.37,1911.37 3393,1981 3638,1981
VCC3.3V-VL822 on PWR "VCC3.3V-VL822_L03_P007" (solid, remove dead copper, pour order 7): 3666,1705 3667,1704 3667,1584 3628,1545 3493,1545 3436,1488 2938,1488 2845,1581 2845,2104 2953,2212 3283,2212 3317,2178 3317,2131 3303,2117 3267,2117 3241,2143 3025,2143 2934,2052 2934,1669 3021,1582 3346,1582 3434,1670 3631,1670
GND on PWR "GND_L03_P015" (solid, remove dead copper, pour order 15): 118.36,1219.68 cw(c118.4,1337.84) 0.25,1337.79 0.25,3385.04 cw(c118.34,3385.06) 118.36,3503.15 4016,3503.15 cw(c4016.09,3385.13) 4134.11,3385.04 4134.11,1337.8 cw(c4016.02,1337.78) 4016,1219.69
VCC3V3-B on PWR "VCC3V3-B_L03_P001" (solid, remove dead copper, pour order 1): 3874,2242 3486,2242 3413,2315 3413,2720 3464,2771 3918,2771 3969,2720 3969,2481 3922,2434 3857,2434 3852,2439 3852,2454 3862,2464 3901,2464 3914,2477 3914,2522 3892,2544 3892,2649 3845,2696 3577,2696 3511,2630 3511,2367 3565,2313 3803,2313
VCC1V2-C on PWR "VCC1V2-C_L03_P002" (solid, remove dead copper, pour order 2): 3280,2273 3270,2263 3163,2263 3113,2313 3039,2313 2875,2313 2821,2367 2821,2630 2887,2696 3155,2696 3202,2649 3202,2544 3224,2522 3224,2477 3211,2464 3042,2464 3028,2450 3028,2367 3038,2357 3108,2357 3134,2383 3272,2383 3280,2375 3280,2357
VCC3V3-C on PWR "VCC3V3-C_L03_P003" (solid, remove dead copper, pour order 3): 3184,2242 2816,2242 2714,2344 2714,2683 2802,2771 3228,2771 3279,2720 3279,2481 3232,2434 3167,2434 3162,2439 3162,2454 3172,2464 3211,2464 3224,2477 3224,2522 3202,2544 3202,2649 3155,2696 2887,2696 2821,2630 2821,2367 2875,2313 3113,2313
VCC1V2-B on PWR "VCC1V2-B_L03_P000" (solid, remove dead copper, pour order 0): 3970,2273 3960,2263 3853,2263 3803,2313 3729,2313 3565,2313 3511,2367 3511,2630 3577,2696 3845,2696 3892,2649 3892,2544 3914,2522 3914,2477 3901,2464 3732,2464 3718,2450 3718,2367 3728,2357 3798,2357 3824,2383 3962,2383 3970,2375 3970,2357
GND on SIGNAL "GND_L01_P010" (solid, remove dead copper, pour order 10): 48,3522 0.25,3474.25 0.25,3158 302,3158 335,3125 335,2820 418,2820 450,2788 450,2787 562,2787 645,2870 645,3522
GND on SIGNAL "GND_L01_P014" (solid, remove dead copper, pour order 14): 1003,2485 1003,2353 1019,2337 1921,2337 1939,2355 1939,2514 1926,2527 1045,2527
GND on SIGNAL "GND_L01_P013" (solid, remove dead copper, pour order 13): 1001,1395 983,1377 983,1268 1000,1251 1937,1251 1951,1265 1951,1384 1940,1395
VCC5V-B on SIGNAL "VCC5V-B_L01_P009" (solid, remove dead copper, pour order 9): 392.67,1757 392.67,1574.33 472,1495 1950,1495 1965,1510 1965,1618 1947,1636 544,1636 480.67,1699.33 480.67,1749 462.67,1767 402.67,1767
VCC5V-A on SIGNAL "VCC5V-A_L01_P008" (solid, remove dead copper, pour order 8): 275.67,2456.67 303,2484 461,2484 473.83,2471.17 502.67,2500 995,2500 1033,2538 1927,2538 1946,2557 1946,2716 1933,2729 796,2729 705,2638 570,2638 510,2578 341,2578 275.67,2512.67
VCC12V on SIGNAL (Bottom) "VCC12V_L04_P012" (solid, remove dead copper, pour order 12): 39,2549 5,2515 5,1963 101,1867 218,1867 244,1841 244,1581 321,1504 624,1504 701,1427 866,1427 890,1451 890,1646 865,1671 865,2343 479,2343 273,2549
VCC12V on SIGNAL (Bottom) "VCC12V_L04_P011" (solid, remove dead copper, pour order 11): 452,2703 466,2689 466,2471 490,2447 708,2447 733,2472 733,2659 744,2670 879,2670 890,2659 890,2381 865,2356 379,2356 334,2401 334,2682 355,2703
GND on GROUND "GND_L02_P004" (solid, remove dead copper, pour order 4): 118.36,1219.68 cw(c118.4,1337.84) 0.25,1337.79 0.25,3385.04 cw(c118.34,3385.06) 118.36,3503.15 4016,3503.15 cw(c4016.09,3385.13) 4134.11,3385.04 4134.11,1337.8 cw(c4016.02,1337.78) 4016,1219.69

## Other copper
SIGNAL:
  region net VCC12V: 232,1517 232,1494 279,1447 305,1447 381,1523 381,1549 338,1592 307,1592
  region net GND: 440,1450 388,1398 96,1398 73,1375 73,1279 97,1255 377,1255 513,1391 513,1407 470,1450 458,1450
  region net VCC12V: 237,2119 229,2111 229,2035 234,2030 361,2030 368,2037 368,2113 362,2119
  region net GND: 485.67,2250 477,2241.33 477,1940.67 485.67,1932 491.67,1938 537.67,1938 544.67,1931 581,1967.33 581,2212.67 544.67,2249 536.67,2241
  region net GND: 494,1714 485.67,1722.33 485.67,1772 481.67,1776 459.67,1776 455.67,1780 455.67,1805 459.67,1809 480.67,1809 485.67,1814 485.67,1932 491.67,1938 537.67,1938 544.67,1931 544.67,1720.67 538,1714
  region net VCC5V-B: 275.67,1844 275.67,1923 290.67,1938 467,1938 480.67,1924.33 480.67,1822 475.67,1817 455.67,1817 449.67,1811 449.67,1774 453.67,1770 474.67,1770 480.67,1764 480.67,1703 472.67,1695 408.67,1695 392.67,1711 392.67,1802 364.67,1830 289.67,1830
  region net NetC18_2: 136.67,1810 140.67,1814 371.67,1814 384.67,1801 384.67,1673 372.67,1661 251,1661 230,1682 230,1752 203,1779 140.67,1779 136.67,1783
  region net VCC12V: 115,1837 132,1820 224,1820 231,1827 231,1891 224,1898 180,1898 172,1906 172,1926 163,1935 123,1935 115,1927
  region net GND: 102,1891 84,1873 26,1873 15,1884 15,1965 41,1991 218,1991 231,1978 231,1913 226,1908 187,1908 184,1911 184,1931 171,1944 114,1944 102,1932
  region net GND: 146,1772 128,1754 128,1728 133,1723 217,1723 221,1727 221,1747.51 196.51,1772 188,1772
  region net GND: 188,2490 184,2486 184,2456 191,2449 260,2449 267,2456 267,2483 260,2490
  region net GND: 94,2479 94,2423 85,2414 12,2414 5,2421 5,2480 13,2488 85,2488
  region net GND: 146,2318 128,2300 128,2274 133,2269 217,2269 221,2273 221,2293.51 196.51,2318 188,2318
  region net VCC12V: 19,2670 19,2521 36,2504 250,2504 336,2590 410,2590 424,2604 424,2681 408,2697 46,2697
  region net VCC5V-A: 275.67,2390 275.67,2469 290.67,2484 474.67,2484 480.67,2478 480.67,2368 475.67,2363 455.67,2363 449.67,2357 449.67,2320 453.67,2316 474.67,2316 480.67,2310 480.67,2259.67 462,2241 408.67,2241 392.67,2257 392.67,2348 364.67,2376 289.67,2376
  region net GND: 494.67,2241 485.67,2250 485.67,2318 481.67,2322 459.67,2322 455.67,2326 455.67,2351 459.67,2355 480.67,2355 485.67,2360 485.67,2478 491.67,2484 537.67,2484 544.67,2477 544.67,2249 536.67,2241
  region net NetC4_2: 136.67,2356 140.67,2360 371.67,2360 384.67,2347 384.67,2219 372.67,2207 251,2207 230,2228 230,2295.67 200.67,2325 140.67,2325 136.67,2329
  region net VCC12V: 115,2383 132,2366 224,2366 231,2373 231,2435 224,2442 182,2442 172,2452 172,2472 163,2481 123,2481 115,2473
  region net VIN: 4,3159 4,2849 23,2830 92,2830 106,2816 106,2756 124,2738 299,2738 335,2774 335,3125 301,3159
GROUND:
  pour cut-out: 3852.14,2899.91 3824.58,2899.91 3824.58,2877.66 3852.14,2877.66
  pour cut-out: 3852.14,2867.03 3824.58,2867.03 3824.58,2844.79 3852.14,2844.79
  pour cut-out: 3911.2,2867.03 3883.64,2867.03 3883.64,2844.79 3911.2,2844.79
  pour cut-out: 3911.2,2899.91 3883.64,2899.91 3883.64,2877.66 3911.2,2877.66
  pour cut-out: 3975.88,2901 3948.32,2901 3948.32,2878.75 3975.88,2878.75
  pour cut-out: 3975.88,2868.12 3948.32,2868.12 3948.32,2845.88 3975.88,2845.88
  pour cut-out: 4034.94,2868.12 4007.38,2868.12 4007.38,2845.88 4034.94,2845.88
  pour cut-out: 4034.94,2901 4007.38,2901 4007.38,2878.75 4034.94,2878.75
  pour cut-out: 3881.97,3252.49 3921.34,3252.49 3921.26,3221.08 3921.34,3220.99 3881.97,3220.99
  pour cut-out: 3938.66,3252.49 3978.03,3252.49 3977.95,3221.08 3978.03,3220.99 3938.66,3220.99
  pour cut-out: 3978.03,3095.01 3938.66,3095.01 3938.74,3063.6 3938.66,3063.51 3978.03,3063.51
  pour cut-out: 3881.97,3095.01 3921.34,3095.01 3921.26,3063.6 3921.34,3063.51 3881.97,3063.51
PWR:
  pour cut-out: 3051.37,1699.55 3049.06,1697.24 3049.06,1670.36 3051.37,1668.05 3070.43,1668.05 3072.74,1670.36 3072.74,1695.61 3072.74,1697.24 3070.43,1699.55
  pour cut-out: 3098.57,1699.55 3096.26,1697.24 3096.26,1670.36 3098.57,1668.05 3117.63,1668.05 3119.94,1670.36 3119.94,1695.61 3119.94,1697.24 3117.63,1699.55
  pour cut-out: 3145.87,1699.55 3143.56,1697.24 3143.56,1670.36 3145.87,1668.05 3164.93,1668.05 3167.24,1670.36 3167.24,1695.61 3167.24,1697.24 3164.93,1699.55
  pour cut-out: 2699.44,1525.84 2699.44,1464.28 2699.57,1464.16 2754.68,1464.16 2754.68,1525.72 2754.56,1525.84
  pour cut-out: 2598.15,1477.31 2625.71,1477.31 2625.71,1453.68 2598.15,1453.68
  pour cut-out: 2598.15,1430.06 2625.71,1430.06 2625.71,1406.43 2598.15,1406.43
  pour cut-out: 2464.29,1398.58 2491.85,1398.58 2491.85,1374.95 2464.29,1374.95
  pour cut-out: 2464.29,1430.07 2491.85,1430.07 2491.85,1406.44 2464.29,1406.44
  pour cut-out: 2464.29,1461.57 2491.85,1461.57 2491.85,1437.94 2464.29,1437.94
  pour cut-out: 2464.29,1493.06 2491.85,1493.06 2491.85,1469.43 2464.29,1469.43
SIGNAL (Bottom):
  region net VCC3V3-B: 3635,3010 3639,3006 3639,2941 3634,2936 3634,2863 3626,2855 3589,2855 3580,2864 3580,3005 3585,3010
  region net VCC3V3-C: 3173,3009 3177,3005 3177,2940 3172,2935 3172,2862 3164,2854 3127,2854 3118,2863 3118,3004 3123,3009
  region net GND: 3667,1424 3777,1424 3782,1429 3782,1475 3778,1479 3627,1479 3623,1475 3623,1468
  region net GND: 3608,1821 3617,1812 3617,1744 3621,1740 3643,1740 3647,1736 3647,1711 3643,1707 3622,1707 3617,1702 3617,1584 3611,1578 3565,1578 3558,1585 3558,1813 3566,1821
  region net GND: 3612,2208 3617,2203 3617,2070 3621,2066 3643,2066 3647,2062 3647,2037 3643,2033 3622,2033 3617,2028 3617,1910 3611,1904 3565,1904 3558,1911 3558,2202 3564,2208
  region net GND: 3953.01,2020 3960,2013.01 3960,1985 3957,1982 3908,1982 3905,1985 3905,2015 3910,2020
  region net GND: 3953.01,1694 3960,1687.01 3960,1659 3957,1656 3908,1656 3905,1659 3905,1689 3910,1694
  region net GND: 4130,1484 4019,1484 4011,1476 4011,1422 4002,1413 3978,1413 3973,1408 3973,1380 3977,1376 3999,1376 4007,1368 4007,1298 3995,1286 3914,1286 3883,1255 3702,1255 3691,1244 3610,1244 3601,1253 3601,1313 3595,1319 3558,1319 3552,1313 3552,1228 3564,1216 4071,1216 4140,1285 4140,1474
  region net LXO-C: 3130,2477 3132.22,2474.78 3384.78,2474.78 3397,2487 3397,2556 3389,2564 3291,2564 3282,2555 3282,2505 3273,2496 3177,2496 3167,2486 3132,2486 3130,2484
  region net LXO-B: 3820,2477 3822.22,2474.78 4074.78,2474.78 4087,2487 4087,2556 4079,2564 3981,2564 3972,2555 3972,2505 3963,2496 3867,2496 3857,2486 3822,2486 3820,2484
  region net VCC1V2-B: 3922,2381 3915,2374 3915,2347.17 3938,2324.17 3938,2289 3947,2280 4084,2280 4097,2293 4097,2383 4076,2404 3963,2404 3940,2381
  region net GND: 3938,2457 3942,2453 3942,2390 3937,2385 3920,2385 3911,2376 3911,2341 3929,2323 3929,2292 3917,2280 3810,2280 3806,2284 3806,2307 3810,2311 3833,2311 3845,2323 3845,2355 3878,2388 3902,2388 3907,2393 3907,2453 3911,2457
  region net GND: 3248,2457 3252,2453 3252,2390 3247,2385 3230,2385 3221,2376 3221,2341 3239,2323 3239,2292 3227,2280 3120,2280 3116,2284 3116,2307 3120,2311 3143,2311 3155,2323 3155,2355 3188,2388 3212,2388 3217,2393 3217,2453 3221,2457
  region net GND: 4071,1865 4071,1790 4066,1785 4010,1785 4004,1791 4004,1854 4015,1865 4062,1865
  region net GND: 4071,2191 4071,2116 4066,2111 4010,2111 4004,2117 4004,2180 4015,2191 4062,2191
  region net VCC1V2-C: 3232,2381 3225,2374 3225,2343 3245,2323 3245,2292 3257,2280 3394,2280 3407,2293 3407,2383 3386,2404 3273,2404 3250,2381
  region net VCC12V: 3712,1374 3724,1362 3724,1297 3717,1290 3696,1290 3689,1283 3689,1257 3684,1252 3614,1252 3608.71,1257.29 3608.71,1359.71 3623,1374
  region net VBUS: 4000,2182 4013,2195 4088,2195 4090,2197 4090,2227 4087,2230 3997,2230 3990,2223 3948,2223 3931,2206 3931,2180
  region net VBUS: 4000,1856 4013,1869 4088,1869 4090,1871 4090,1901 4087,1904 3997,1904 3990,1897 3948,1897 3931,1880 3931,1854
  region net NetC3_2: 3966,2032 3962,2028 3731,2028 3718,2041 3718,2169 3730,2181 3876,2181 3888,2169 3888,2077 3902,2063 3962,2063 3966,2059
  region net NetC17_2: 3966,1706 3962,1702 3731,1702 3718,1715 3718,1843 3730,1855 3876,1855 3888,1843 3888,1751 3902,1737 3962,1737 3966,1733
  region net VCC1.05V-VL822: 3827,1998 3827,1919 3812,1904 3628,1904 3622,1910 3622,2020 3627,2025 3647,2025 3653,2031 3653,2068 3649,2072 3628,2072 3622,2078 3622,2202 3628,2208 3705,2208 3710,2203 3710,2040 3738,2012 3813,2012
  region net VCC3.3V-VL822: 3827,1672 3827,1593 3812,1578 3628,1578 3622,1584 3622,1694 3627,1699 3647,1699 3653,1705 3653,1742 3649,1746 3628,1746 3622,1752 3622,1813 3630,1821 3694,1821 3710,1805 3710,1714 3738,1686 3813,1686
  region net VBUS: 3908,2069 3896,2081 3896,2146 3903,2153 3924,2153 3931,2160 3931,2180 3938,2187 3995,2187 4000,2182 4000,2083 3986,2069
  region net VBUS: 3908,1743 3896,1755 3896,1820 3903,1827 3924,1827 3931,1834 3931,1854 3938,1861 3995,1861 4000,1856 4000,1757 3986,1743
  region net VBUS: 3793,1445 3793,1524 3808,1539 3992,1539 3998,1533 3998,1423 3993,1418 3973,1418 3967,1412 3967,1375 3971,1371 3992,1371 3998,1365 3998,1304 3990,1296 3926,1296 3910,1312 3910,1403 3882,1431 3807,1431
  region net NetC30_2: 3663,1411 3667,1415 3873,1415 3892,1396 3892,1276 3880,1264 3745,1264 3731,1278 3731,1368 3714,1385 3666,1385 3663,1388

## Silkscreen, mask and mechanical layers (free items; w line width, h text height)
Top Overlay:
  text "USB3.1 Gen2/10Gpbs" at 4045.8,2810.25 h60 r270
  text "2026/3/10" at 3830,2806 h60 r270
  text "misaka10039" at 3944,2805 h60 r270
  text "Ver1.0" at 3833,2110 h60 r270
Mechanical 1:
  lines w0.5: 0.25,1337.79 ccw(c118.4,1337.84) 118.36,1219.68 4016,1219.68 ccw(c4016.02,1337.78) 4134.11,1337.8 4134.11,3385.04 ccw(c4016.09,3385.13) 4016,3503.15 118.36,3503.15 ccw(c118.34,3385.06) 0.25,3385.04 0.25,1337.79 ; 598.68,1776.06 ccw(c716.83,1776.11) 716.79,1657.95 2724.66,1657.95 ccw(c2724.68,1776.04) 2842.77,1776.06 2842.77,2209.57 ccw(c2724.68,2209.59) 2724.66,2327.68 716.79,2327.68 ccw(c716.83,2209.52) 598.68,2209.57 598.68,1776.06 ; 598.68,2883.74 ccw(c716.83,2883.78) 716.79,2765.63 2724.66,2765.63 ccw(c2724.68,2883.72) 2842.77,2883.74 2842.77,3317.24 ccw(c2724.68,3317.27) 2724.66,3435.35 716.79,3435.35 ccw(c716.83,3317.2) 598.68,3317.24 598.68,2883.74